# Altium PCB Modem.PcbDoc
Units mm, origin at the board's own origin, x right, y up, seen from the top; angles counter-clockwise.
Board outline 97.79 x 108.08 mm, 2 copper layers (Top Layer, Bottom Layer), stack 1.671 mm thick; 19 components, 16 nets, 97 pads, 0 vias.
Unrouted connection lines stored in the file: 2.
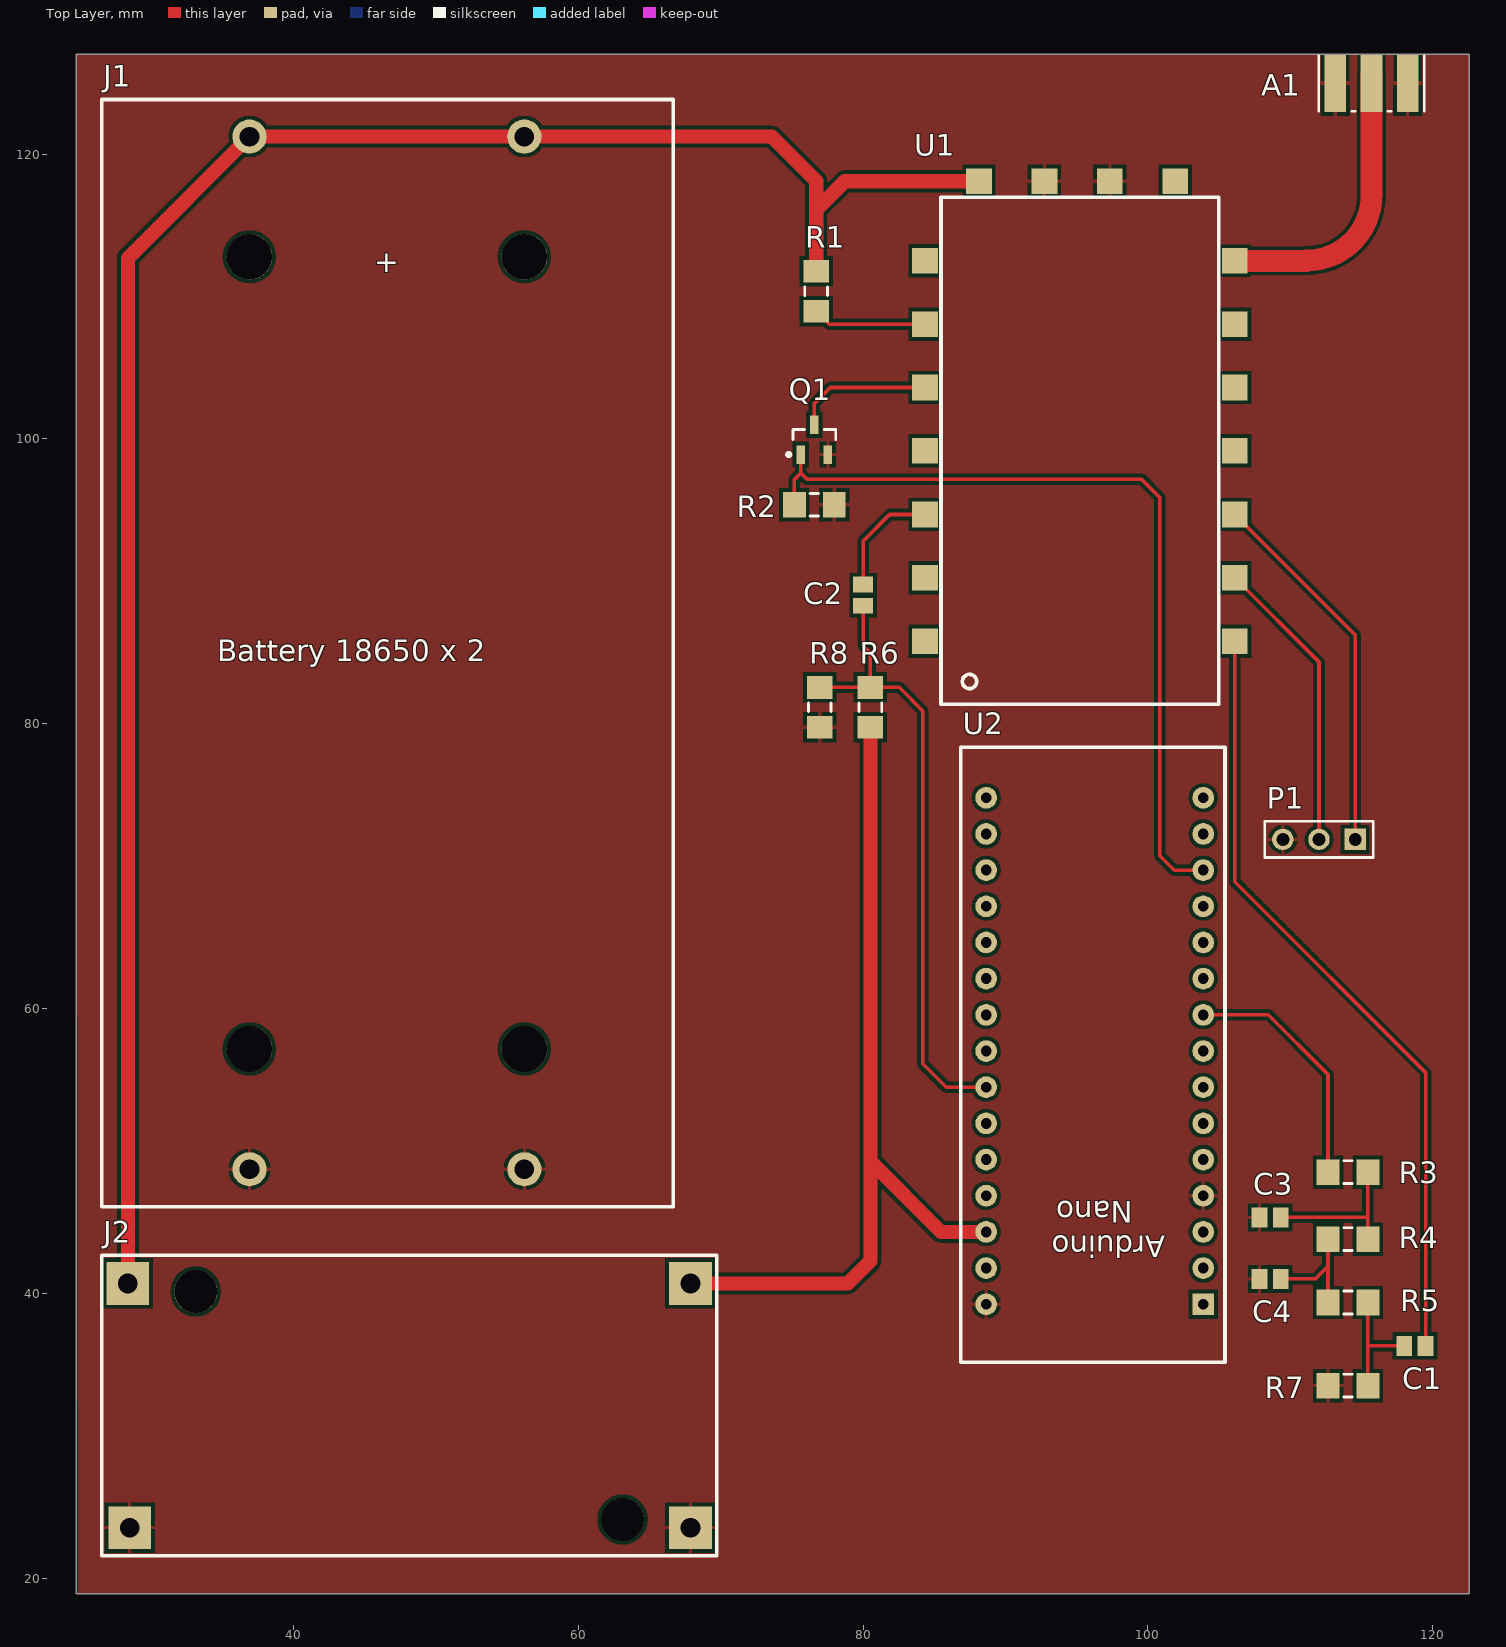
[diagram p0: Top Layer view]
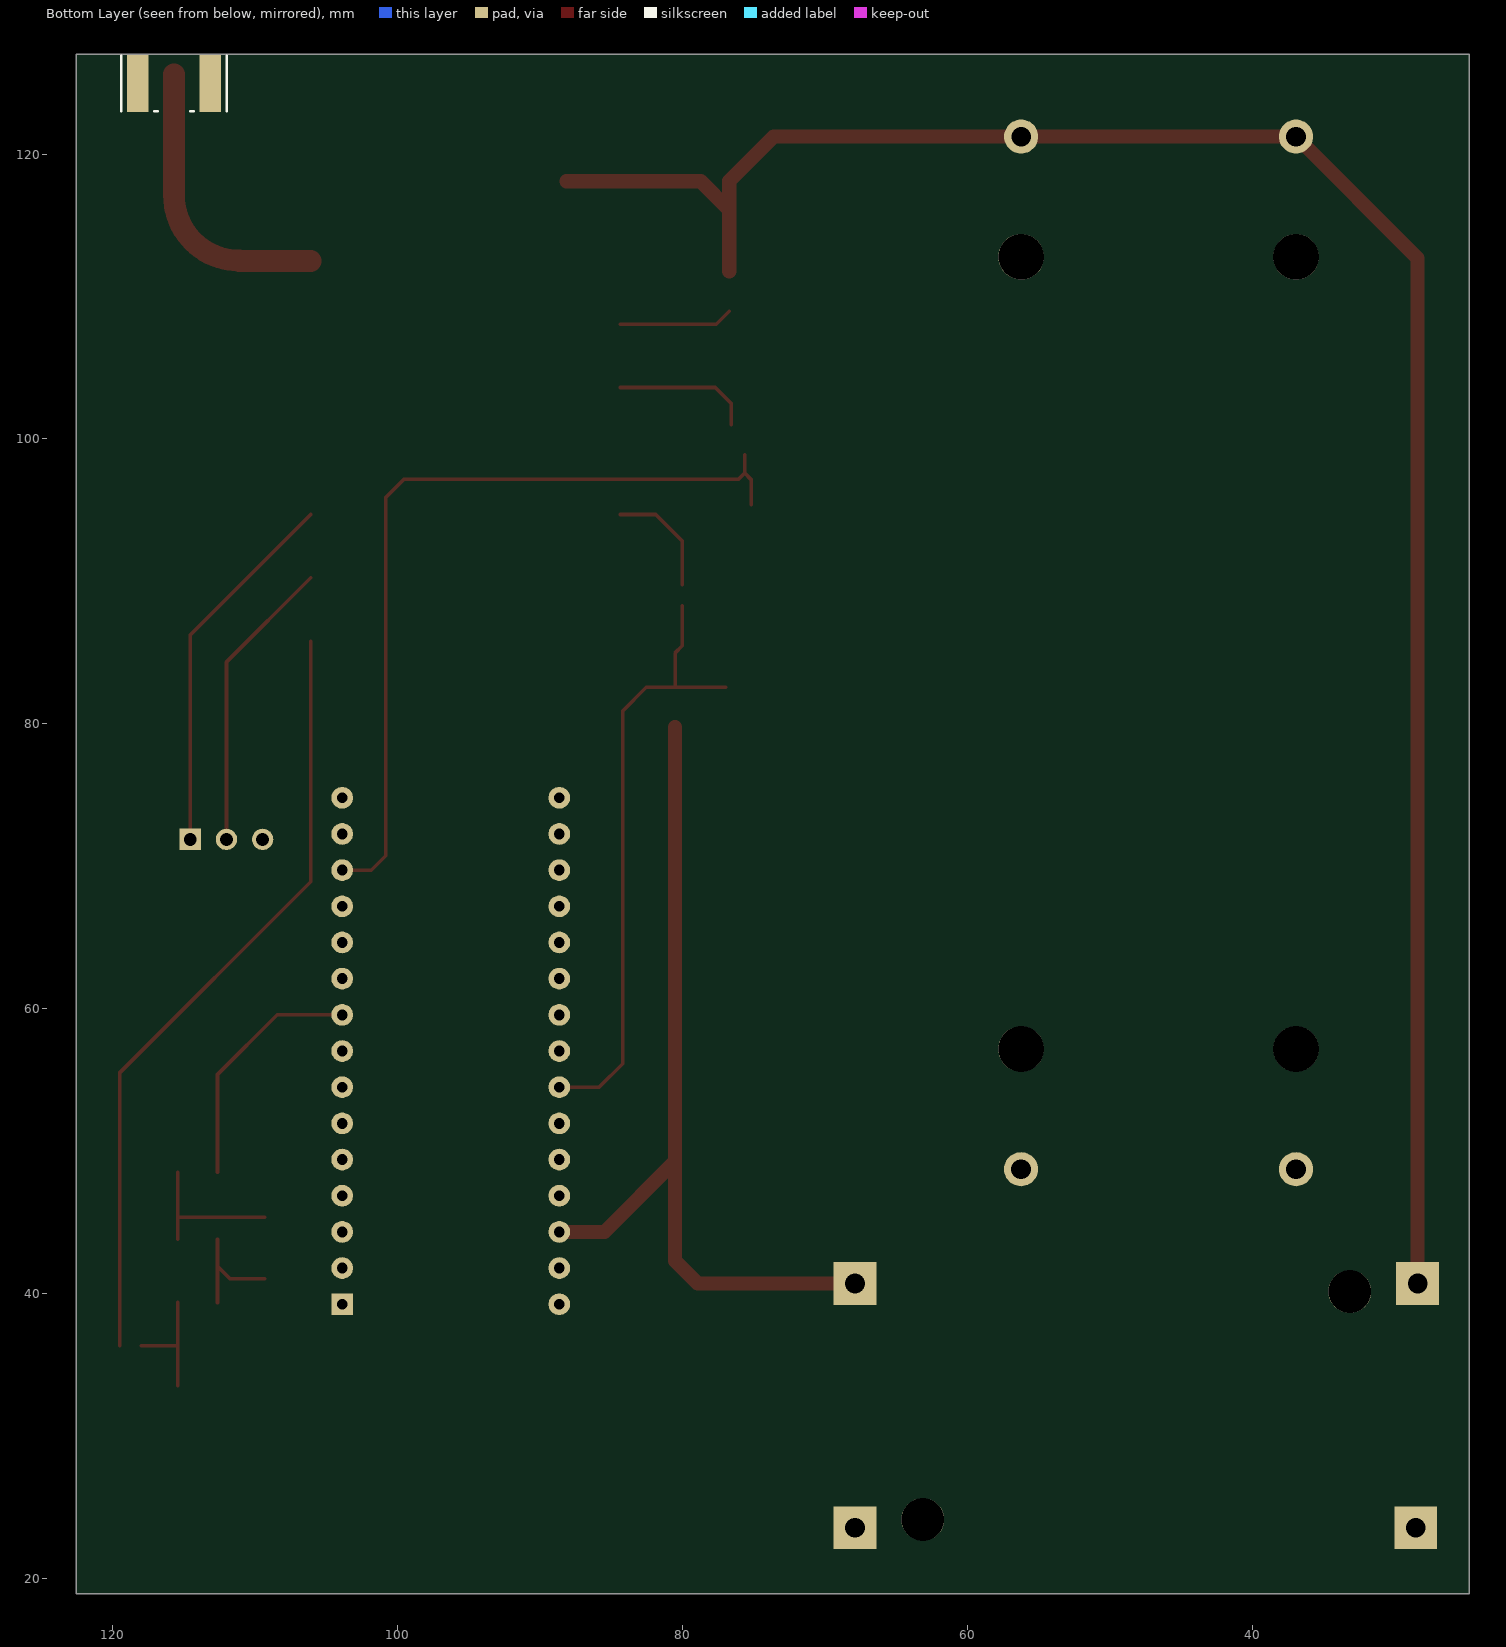
[diagram p1: Bottom Layer view, seen from below]

## Layer stack, top to bottom
Top Solder: solder mask 0.0102, Solder Resist, Dk 3.5
Top Layer: signal copper 0.0356
Dielectric 1: dielectric 1.6, FR-4, Dk 4.8
Bottom Layer: signal copper 0.0356
Bottom Solder: solder mask 0.0102, Solder Resist, Dk 3.5

## Board outline
24.765,127 122.555,127 122.555,18.923 24.765,18.923 24.765,127

## Design rules (kind name [scope] priority, off if disabled: settings)
Clearance [All] p1: gap=0.254
PolygonConnect [All] p1: connectstyle=Relief reliefconductorwidth=0.254 reliefentries=4 polygonreliefangle="90 Angle" airgapwidth=0.254
RoutingVias [All] p1: holewidth=0.711 width=1.27 viastyle="Through Hole" minholewidth=0.711 minwidth=1.27 maxholewidth=0.711 maxwidth=1.27
SolderMaskExpansion [All] p1: expansion=0.102
Width [All] p1: maxlimit=2.54 minlimit=0.254 preferedwidth=0.254 bottomlayer_maxwidth=0.254 minimp=50.000000 maximp=50.000000 favimp=50.000000
30 further rules are at their usual default settings.

## Classes and differential pairs
component class Modem: A1 C1 C2 C3 C4 J1 J2 P1 Q1 R1 R2 R3 R4 R5 R6 R7 R8 U1

## Components (designator, comment, footprint, x,y, rotation, side; value= is the part's Value field where it differs from the comment)
A1 "Basic Antenna" CON-SMA-EDGE062 115.697,124.968 r90 top
C1 "Cap Pol3" C0805 118.745,36.322 r0 top
C2 "Cap Pol3" C0805 80.01,89.027 r270 top
C3 "Cap Pol3" C0805 108.585,45.339 r180 top
C4 "Cap Pol3" C0805 108.585,41.021 r180 top
J1 "BatteryHolder18650" BatteryHolder18650 66.675,123.825 r270 top
J2 "CN6009" CN6009 26.543,42.672 r0 top
P1 "Header 3" HDR1X3 114.554,71.882 r180 top
Q1 "2N7002" SOT23_N 76.581,99.949 r90 top
R1 "ERJP08D" 8-1206 76.708,110.363 r90 top
R2 "ERJP08D" 8-1206 76.581,95.377 r180 top
R3 "ERJP08D" 8-1206 114.046,48.514 r180 top
R4 "ERJP08D" 8-1206 114.046,43.815 r0 top
R5 "ERJP08D" 8-1206 114.046,39.37 r0 top
R6 "ERJP08D" 8-1206 80.518,81.153 r270 top
R7 "ERJP08D" 8-1206 114.046,33.528 r180 top
R8 "ERJP08D" 8-1206 76.962,81.153 r90 top
U1 "SA818" SA818 85.471,116.967 r0 top
U2 "arduinoNano" "Arduino nano" 105.41,35.179 r90 top

## Footprints (in the part's own frame and the unit in brackets; to place one, negate y for a bottom-side part, rotate by r counter-clockwise, add the part's x,y. Pads: shape width x height; smd on the part's side, far side on the other; paste and mask are expansions set on the pad)
8-1206 [mm] "Chip Resistor; Body 3.1 x 1.6 mm (LxW typ)"
  rect 1.6x1.8 smd: 1(-1.4,0) 2(1.4,0)
  silkscreen extent -0.3,-0.8 0.3,0.8
"Arduino nano" [mil] "arduino nano"
  rect 60x60 hole 30: 1(160,60)
  round 60 hole 30: 2(260,60) 3(360,60) 4(460,60) 5(560,60) 6(660,60) 7(760,60) 8(860,60) 9(960,60) 10(1060,60) 11(1160,60) 12(1260,60) 13(1360,60) 14(1460,60) 15(1560,60) 16(1460,660) 17(1360,660) 18(1260,660) 19(1160,660) 20(1060,660) 21(960,660) 22(860,660) 23(760,660) 24(660,660) 25(560,660) 26(460,660) 27(360,660) 28(260,660) 29(160,660) 30(1560,660)
  silkscreen extent 0,0 1700,730
BatteryHolder18650 [mm]
  round 2.4 hole 1.38: 1(2.6,-10.455) 2(75.1,-10.45) 3(2.6,-29.755) 4(75.1,-29.755)
  round 3.2 hole 3.2 unplated mask+1: ""(11.04,-10.455) ""(11.04,-29.755) ""(66.66,-29.755) ""(66.66,-10.455)
  silkscreen extent 0,-40.13 77.72,0
C0805 [mm] "Chip Capacitor, Body 2.0x1.3mm, IPC High Density"
  rect 1.1x1.4 smd: 1(-0.75,0) 2(0.75,0)
  body extent -1.1,-0.72 1.1,0.72, height 1.4
CN6009 [mm]
  rect 3x3 hole 1.38: 1(1.841,-1.968) 2(1.968,-19.113) 3(41.338,-1.968) 4(41.338,-19.113)
  round 3 hole 3 mask+0.5: ""(6.604,-2.54) ""(36.576,-18.54)
  silkscreen extent 0,-21.08 43.18,0
CON-SMA-EDGE062 [mil] "Connector, SMA Female Edge Mount for 0.062\" Thick Board, 5-Lead, Body Dia. 7.9mm"
  rect 160x60 smd: G(0,100) G(0,-100) S(0,0)
  rect 160x60 smd far side: G(0,100) G(0,-100)
  silkscreen extent -77,-146 76,146, body extent -77,-163 387,163, height 187
HDR1X3 [mm] "Connector; Header; 3 Position"
  rect 1.5x1.5 hole 0.9: 1(0,0)
  round 1.5 hole 0.9: 2(2.54,0) 3(5.08,0)
  silkscreen extent -1.27,-1.27 6.35,1.27
SA818 [mm]
  rect 1.8x1.8 smd: 1(-1.12,-31.166) 2(-1.12,-26.721) 3(-1.12,-22.276) 4(-1.12,-17.805) 5(-1.12,-13.36) 6(-1.12,-8.915) 7(-1.12,-4.47) 8(2.667,1.12) 9(7.264,1.12) 10(11.862,1.12) 11(16.459,1.12) 12(20.627,-4.47) 13(20.627,-8.915) 14(20.627,-13.36) 15(20.627,-17.805) 16(20.627,-22.276) 17(20.627,-26.721) 18(20.627,-31.166)
  silkscreen extent 0,-35.61 19.51,0
SOT23_N [mm] "SOT23, 3-Leads, Body 2.9x1.3mm, Pitch 0.95mm, Lead Span 2.3mm, IPC Medium Density"
  rect 1.3x0.6 smd: 1(-1.05,0.95) 2(-1.05,-0.95) 3(1.05,0)
  silkscreen extent -1.17,-1.5 0.7,1.92, body extent -0.7,-1.5 0.7,1.5, height 1.1

## Part data
C1 C2 C3 C4: "Polarized Capacitor (Surface Mount)"
P1: "Header, 3-Pin"
Q1: "N-channel Enhancement Mode Field-effect Transistor"
R1 R2 R3 R4 R5 R6 R7 R8: "Anti-Surge Thick Film Chip Resistor, 10 Ohm to 1M Ohm Range, 0.5% Tolerance, 1206 Size, 0.25 W"

## Nets (pads, with @x,y where several pads share a name; then routed paths per layer and width w, separated by ;. In a path a pad name is that pad's centre, name@x,y a point inside that pad or via, vN(x,y) a via of type N, cw(c..) or ccw(c..) an arc to the next point about the centre after c; other vN are vias at no path point)
+5: J2.3 R6.2 U2.27 | length 60.9
  Top Layer w1: J2.3 78.93,40.703 80.518,42.291 80.518,49.276 ; R6.2 80.518,49.276 ; U2.27 85.471,44.323 80.518,49.276
GND: A1.G C3.2 C4.2 J1.2 J1.4 J2.2 J2.4 P1.3 Q1.2 R2.1 R7.2 R8.1 U1.9 U1.10 U2.4 U2.29
NetA1_S: A1.S U1.12 | length 21.4
  Top Layer w0.254: U1.12@105.791,112.522 106.098,112.215 U1.12
  Top Layer w1.524: U1.12 111.125,112.497 ; 111.125,112.522 ccw(c111.125,117.094) 115.697,117.094 A1.S@115.697,125.603
NetC1_1: C1.1 R5.2 R7.1 | length 8.4
  Top Layer w0.254: R7.1 115.446,36.322 ; R5.2 115.446,36.322 ; C1.1 115.446,36.322
NetC1_2: C1.2 U1.18 | length 55
  Top Layer w0.254: U1.18 106.098,68.908 119.495,55.511 C1.2
NetC2_1: C2.1 U1.3 | length 8.2
  Top Layer w0.254: C2.1 80.01,92.837 81.864,94.691 U1.3
NetC2_2: C2.2 R6.1 R8.2 U2.23 | length 43.8
  Top Layer w0.254: R8.2 R6.1 ; C2.2 80.01,85.471 80.518,84.963 R6.1 ; U2.23 85.852,54.483 84.201,56.134 84.201,80.899 82.547,82.553 R6.1
NetC3_1: C3.1 R3.1 R4.2 | length 10.8
  Top Layer w0.254: C3.1 115.446,45.339 ; R4.2 115.446,45.339 ; R3.1 115.446,45.339
NetC4_1: C4.1 R4.1 R5.1 | length 8.1
  Top Layer w0.254: C4.1 111.757,41.021 112.646,41.91 ; R5.1 112.646,41.91 ; R4.1 112.646,41.91
NetP1_1: P1.1 U1.16 | length 26.3
  Top Layer w0.254: U1.16 114.554,86.235 P1.1
NetP1_2: P1.2 U1.17 | length 20.8
  Top Layer w0.254: U1.17 112.014,84.33 P1.2
NetQ1_1: Q1.1 R2.2 U2.13 | length 58.2
  Top Layer w0.254: R2.2 75.181,97.152 75.631,97.602 ; Q1.1 75.631,97.602 ; U2.13 101.854,69.723 100.838,70.739 100.838,95.885 99.568,97.155 76.078,97.155 75.631,97.602
NetQ1_3: Q1.3 U1.5 | length 9.7
  Top Layer w0.254: Q1.3 76.581,102.489 77.699,103.607 U1.5
NetR1_1: R1.1 U1.6 | length 8
  Top Layer w0.254: R1.1 77.619,108.052 U1.6
NetR3_2: R3.2 U2.9 | length 17.4
  Top Layer w0.254: U2.9 108.458,59.563 112.646,55.375 R3.2
VCC: J1.1 J1.3 J2.1 R1.2 U1.8 | length 143.7
  Top Layer w1: J2.1 28.384,112.689 J1.3 J1.1 73.593,121.225 76.708,118.11 76.708,116.078 ; R1.2 76.708,116.078 ; U1.8 78.717,118.087 76.708,116.078
pads on no net: J1. J2. U1.1 U1.2 U1.4 U1.7 U1.11 U1.13 U1.14 U1.15 U2.1 U2.2 U2.3 U2.5 U2.6 U2.7 U2.8 U2.10 U2.11 U2.12 U2.14 U2.15 U2.16 U2.17 U2.18 U2.19 U2.20 U2.21 U2.22 U2.24 U2.25 U2.26 U2.28 U2.30
copper on no net: | length 934.7
  Top Layer w0.254: 1979.93,773.557 2270.76,482.727 ; 2358.517,497.078 2362.581,497.078 2451.227,408.432 2451.227,14.478

## Polygon pours and split planes (outlines as drawn)
GND on Top Layer "GND" (solid, pour order 0): 24.765,127 122.555,127 122.555,18.923 24.892,18.923

## Dimensions
73.533,30.988 to 138.557,37.973 on Top Overlay
141.478,16.637 to 146.812,46.736 on Top Overlay

## Text inside footprints (layer, text, board x,y; h text height)
J1: Top Overlay "Battery 18650 x 2" at 34.671,84.404 h1.52; Top Overlay "+" at 45.695,111.709 h1.52
U2: Top Overlay "Arduino" at 101.219,44.069 h1.52 r180; Top Overlay "Nano" at 98.933,46.482 h1.52 r180